# EAGLE board cpu3 (EAGLE 7.2.0)
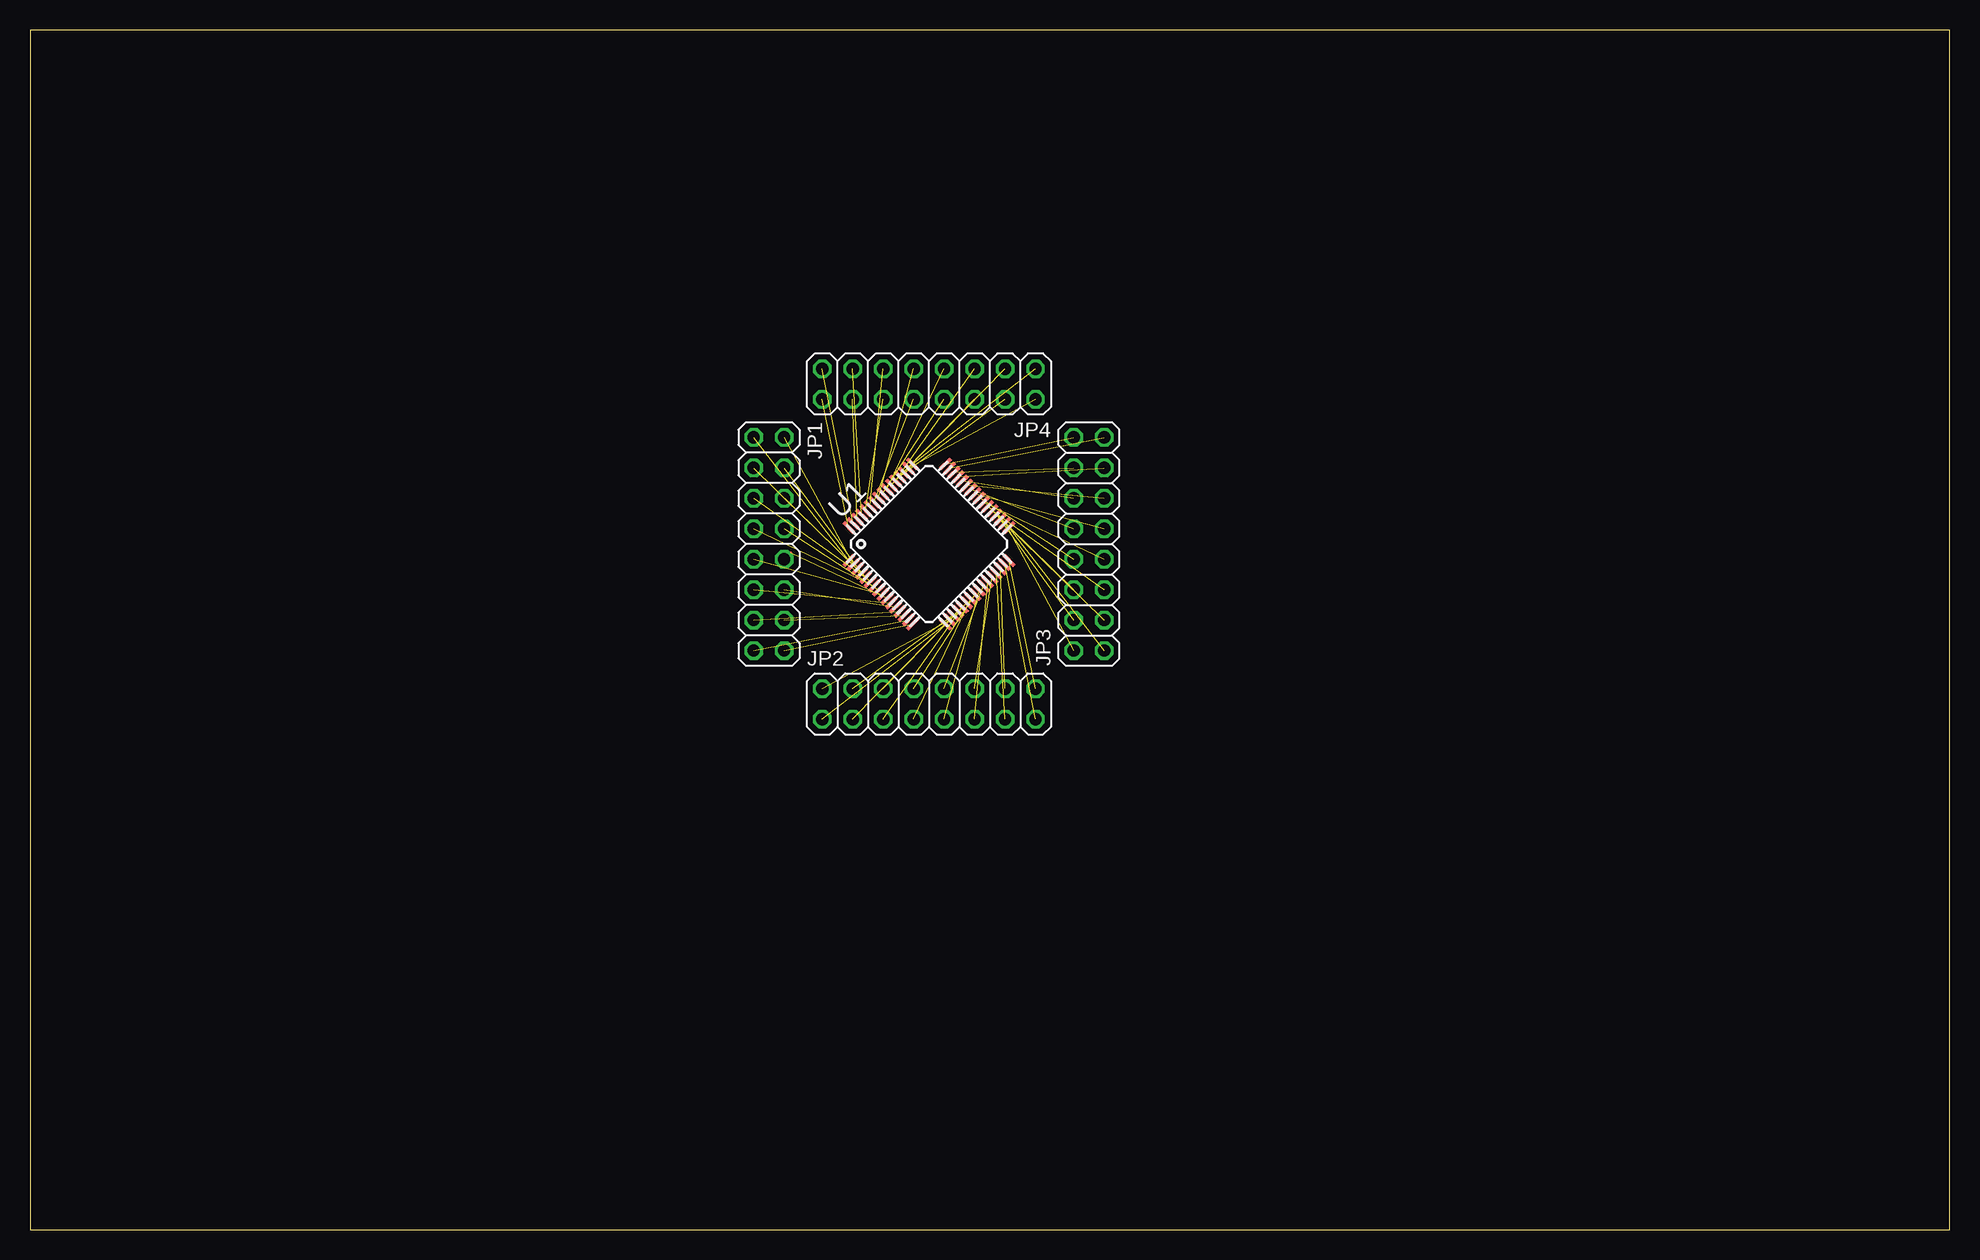
[diagram p0: board, top side]

Size 160 x 100 mm. Coordinates in mm from the lower left corner, seen from the top.
Outline: 0,0 160,0 160,100 0,100 0,0
Copper layers (1*16): Top 0.035mm / dielectric 1.5mm / Bottom 0.035mm
Design rules "default": minimum track width 10mil, minimum drill 24mil, track to track 8mil, track to pad 8mil, pad to pad 8mil, via to via 8mil, smd to smd 8mil, copper to edge 40mil, drill to drill 8mil, minimum pad ring 10mil, minimum via ring 8mil, stop-mask expansion 4mil, vias tented up to drill 0mil, thermal gap 10mil

## Footprints (pad centres in the part's own frame; a part is rotated, then mirrored left to right if it is on the bottom)
2X08 = drill 1.016 octagon: 1 -8.89,-1.27; 2 -8.89,1.27; 3 -6.35,-1.27; 4 -6.35,1.27; 5 -3.81,-1.27; 6 -3.81,1.27; 7 -1.27,-1.27; 8 -1.27,1.27; 9 1.27,-1.27; 10 1.27,1.27; 11 3.81,-1.27; 12 3.81,1.27; 13 6.35,-1.27; 14 6.35,1.27; 15 8.89,-1.27; 16 8.89,1.27
TQFP64 = smd 1.2 x 0.3: 1 -5.7,3.75; 2 -5.7,3.25; 3 -5.7,2.75; 4 -5.7,2.25; 5 -5.7,1.75; 6 -5.7,1.25; 7 -5.7,0.75; 8 -5.7,0.25; 9 -5.7,-0.25; 10 -5.7,-0.75; 11 -5.7,-1.25; 12 -5.7,-1.75; 13 -5.7,-2.25; 14 -5.7,-2.75; 15 -5.7,-3.25; 16 -5.7,-3.75; 33 5.7,-3.75; 34 5.7,-3.25; 35 5.7,-2.75; 36 5.7,-2.25; 37 5.7,-1.75; 38 5.7,-1.25; 39 5.7,-0.75; 40 5.7,-0.25; 41 5.7,0.25; 42 5.7,0.75; 43 5.7,1.25; 44 5.7,1.75; 45 5.7,2.25; 46 5.7,2.75; 47 5.7,3.25; 48 5.7,3.75 | smd 0.3 x 1.2: 17 -3.75,-5.7; 18 -3.25,-5.7; 19 -2.75,-5.7; 20 -2.25,-5.7; 21 -1.75,-5.7; 22 -1.25,-5.7; 23 -0.75,-5.7; 24 -0.25,-5.7; 25 0.25,-5.7; 26 0.75,-5.7; 27 1.25,-5.7; 28 1.75,-5.7; 29 2.25,-5.7; 30 2.75,-5.7; 31 3.25,-5.7; 32 3.75,-5.7; 49 3.75,5.7; 50 3.25,5.7; 51 2.75,5.7; 52 2.25,5.7; 53 1.75,5.7; 54 1.25,5.7; 55 0.75,5.7; 56 0.25,5.7; 57 -0.25,5.7; 58 -0.75,5.7; 59 -1.25,5.7; 60 -1.75,5.7; 61 -2.25,5.7; 62 -2.75,5.7; 63 -3.25,5.7; 64 -3.75,5.7

## Placement (x,y rotation side)
JP1  [2X08]  61.59,57.15 270 top
JP2  [2X08]  74.93,43.81 0 top
JP3  [2X08]  88.27,57.15 90 top
JP4  [2X08]  74.93,70.48 180 top
U1  STM32F10XRXT6  [TQFP64]  74.93,57.15 45 top

## Library data of the parts
JP1-JP4 = pinhead
U1 = stm32

## Nets
N$1: JP1.1 U1.1
N$2: JP1.2 U1.2
N$3: JP1.3 U1.3
N$4: JP1.4 U1.4
N$5: JP1.5 U1.5
N$6: JP1.6 U1.6
N$7: JP1.7 U1.7
N$8: JP1.8 U1.8
N$9: JP1.9 U1.9
N$10: JP1.10 U1.10
N$11: JP1.11 U1.11
N$12: JP1.12 U1.12
N$13: JP1.13 U1.13
N$14: JP1.14 U1.14
N$15: JP1.15 U1.15
N$16: JP1.16 U1.16
N$17: JP2.1 U1.17
N$18: JP2.2 U1.18
N$19: JP2.3 U1.19
N$20: JP2.4 U1.20
N$21: JP2.5 U1.21
N$22: JP2.6 U1.22
N$23: JP2.7 U1.23
N$24: JP2.8 U1.24
N$25: JP2.9 U1.25
N$26: JP2.10 U1.26
N$27: JP2.11 U1.27
N$28: JP2.12 U1.28
N$29: JP2.13 U1.29
N$30: JP2.14 U1.30
N$31: JP2.15 U1.31
N$32: JP2.16 U1.32
N$33: JP3.1 U1.33
N$34: JP3.2 U1.34
N$35: JP3.3 U1.35
N$36: JP3.4 U1.36
N$37: JP3.5 U1.37
N$38: JP3.6 U1.38
N$39: JP3.7 U1.39
N$40: JP3.8 U1.40
N$41: JP3.9 U1.41
N$42: JP3.10 U1.42
N$43: JP3.11 U1.43
N$44: JP3.12 U1.44
N$45: JP3.13 U1.45
N$46: JP3.14 U1.46
N$47: JP3.15 U1.47
N$48: JP3.16 U1.48
N$49: JP4.1 U1.49
N$50: JP4.2 U1.50
N$51: JP4.3 U1.51
N$52: JP4.4 U1.52
N$53: JP4.5 U1.53
N$54: JP4.6 U1.54
N$55: JP4.7 U1.55
N$56: JP4.8 U1.56
N$57: JP4.9 U1.57
N$58: JP4.10 U1.58
N$59: JP4.11 U1.59
N$60: JP4.12 U1.60
N$61: JP4.13 U1.61
N$62: JP4.14 U1.62
N$63: JP4.15 U1.63
N$64: JP4.16 U1.64

## Tracks (layer width: path | path; a pad name or v marks a point on that pad's centre or on a via)
N$1  (1 unrouted)
N$2  (1 unrouted)
N$3  (1 unrouted)
N$4  (1 unrouted)
N$5  (1 unrouted)
N$6  (1 unrouted)
N$7  (1 unrouted)
N$8  (1 unrouted)
N$9  (1 unrouted)
N$10  (1 unrouted)
  Top 0.305: 63.38,56.4 JP1.10
N$11  (1 unrouted)
N$12  (1 unrouted)
N$13  (1 unrouted)
N$14  (1 unrouted)
N$15  (1 unrouted)
N$16  (1 unrouted)
N$17  (1 unrouted)
N$18  (1 unrouted)
N$19  (1 unrouted)
N$20  (1 unrouted)
N$21  (1 unrouted)
N$22  (1 unrouted)
N$23  (1 unrouted)
N$24  (1 unrouted)
N$25  (1 unrouted)
N$26  (1 unrouted)
N$27  (1 unrouted)
N$28  (1 unrouted)
N$29  (1 unrouted)
N$30  (1 unrouted)
N$31  (1 unrouted)
N$32  (1 unrouted)
N$33  (1 unrouted)
N$34  (1 unrouted)
N$35  (1 unrouted)
N$36  (1 unrouted)
N$37  (1 unrouted)
N$38  (1 unrouted)
N$39  (1 unrouted)
N$40  (1 unrouted)
N$41  (1 unrouted)
N$42  (1 unrouted)
N$43  (1 unrouted)
N$44  (1 unrouted)
N$45  (1 unrouted)
N$46  (1 unrouted)
N$47  (1 unrouted)
N$48  (1 unrouted)
N$49  (1 unrouted)
N$50  (1 unrouted)
N$51  (1 unrouted)
N$52  (1 unrouted)
N$53  (1 unrouted)
N$54  (1 unrouted)
N$55  (1 unrouted)
N$56  (1 unrouted)
N$57  (1 unrouted)
N$58  (1 unrouted)
N$59  (1 unrouted)
N$60  (1 unrouted)
N$61  (1 unrouted)
N$62  (1 unrouted)
N$63  (1 unrouted)
N$64  (1 unrouted)